# Altium PCB MEASURE_CURRENT_PCB_V1I1.PcbDoc
Units mil, origin at the board's own origin, x right, y up, seen from the top; angles counter-clockwise.
Board outline 2170 x 1965 mil, 2 copper layers (Top Layer, Bottom Layer); 14 components, 11 nets, 60 pads, 13 vias.
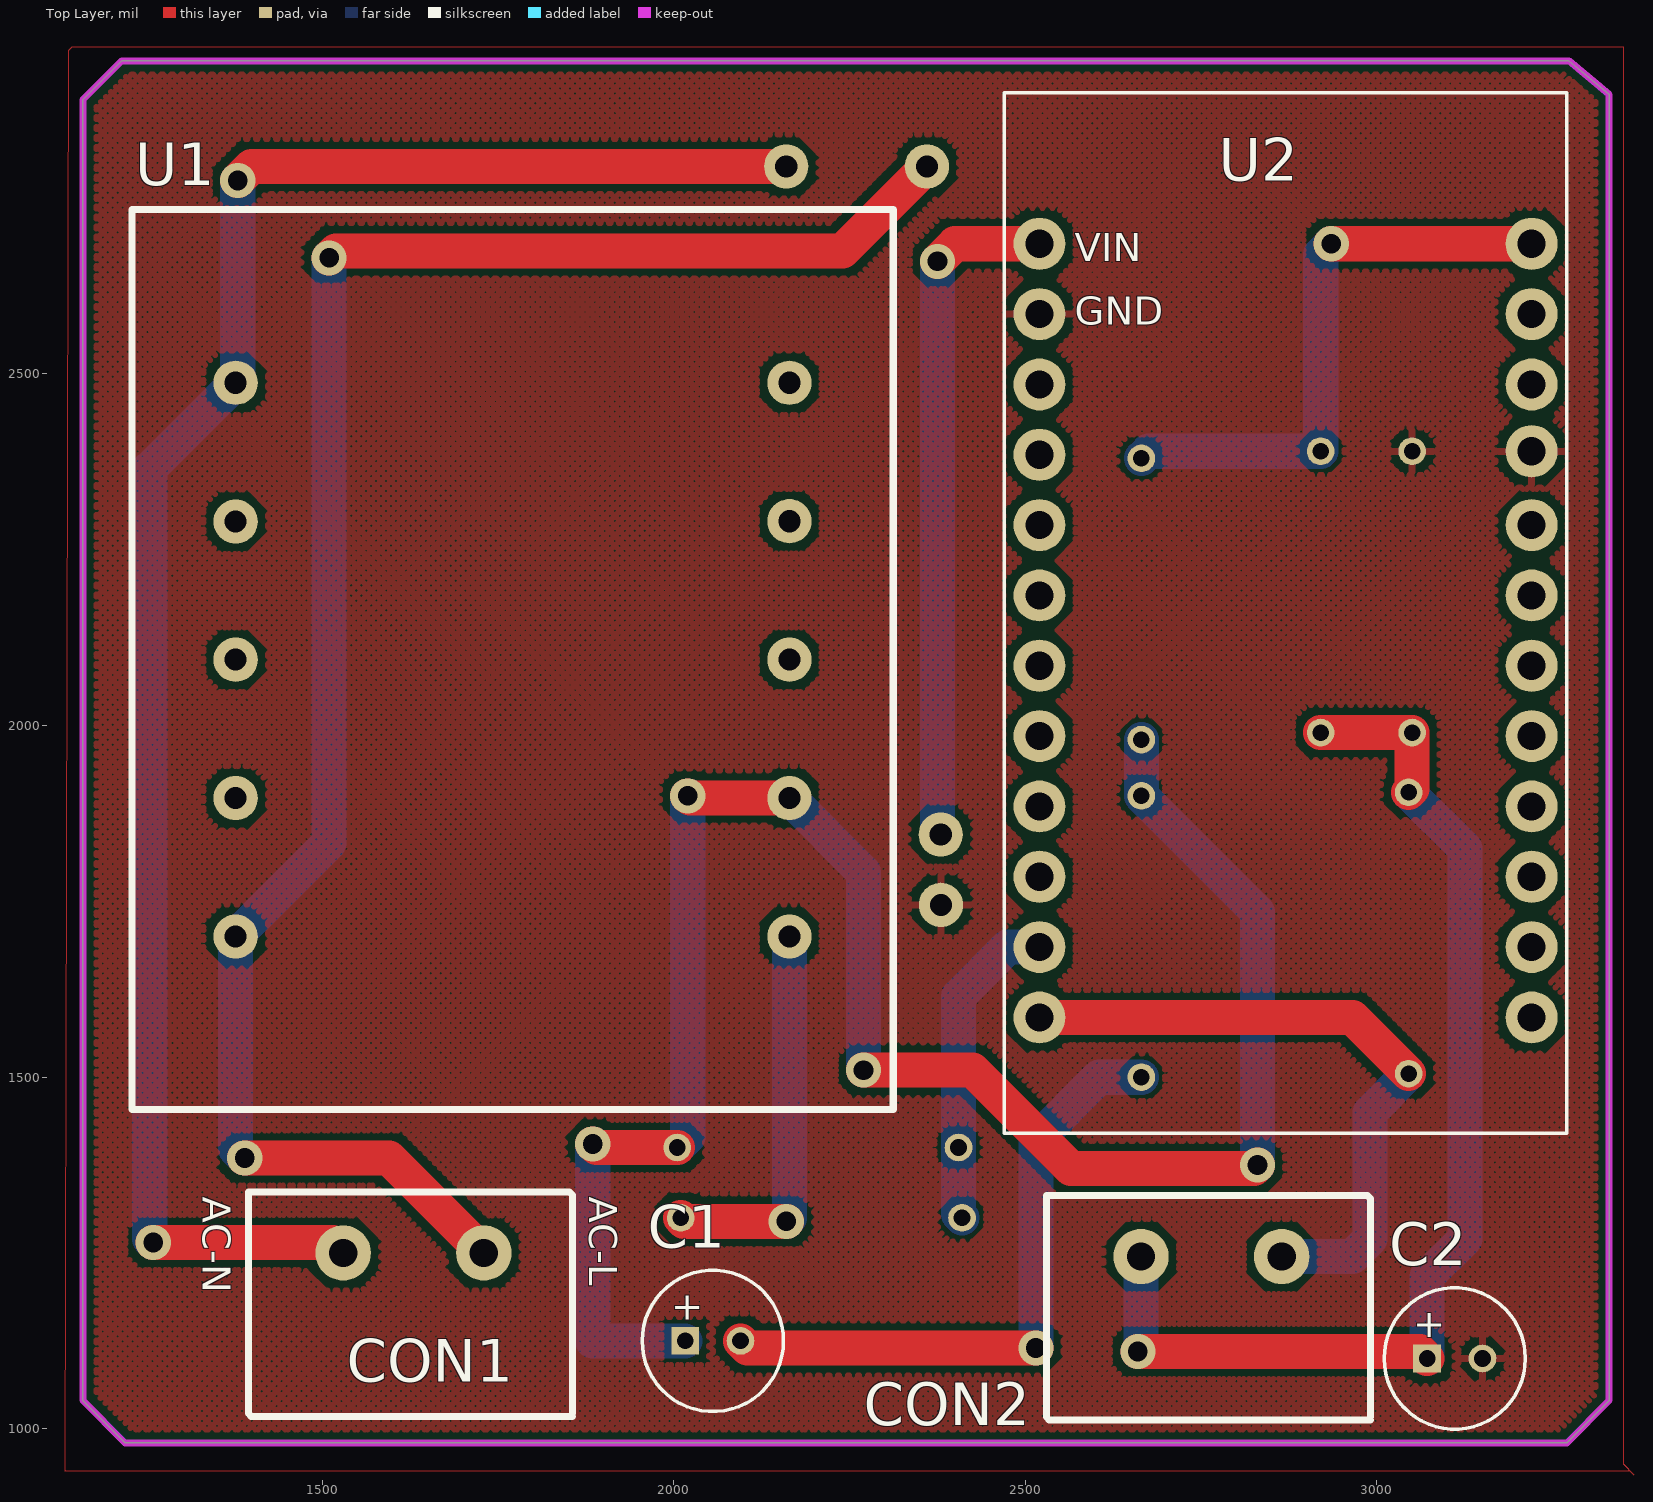
[diagram p0: Top Layer view]
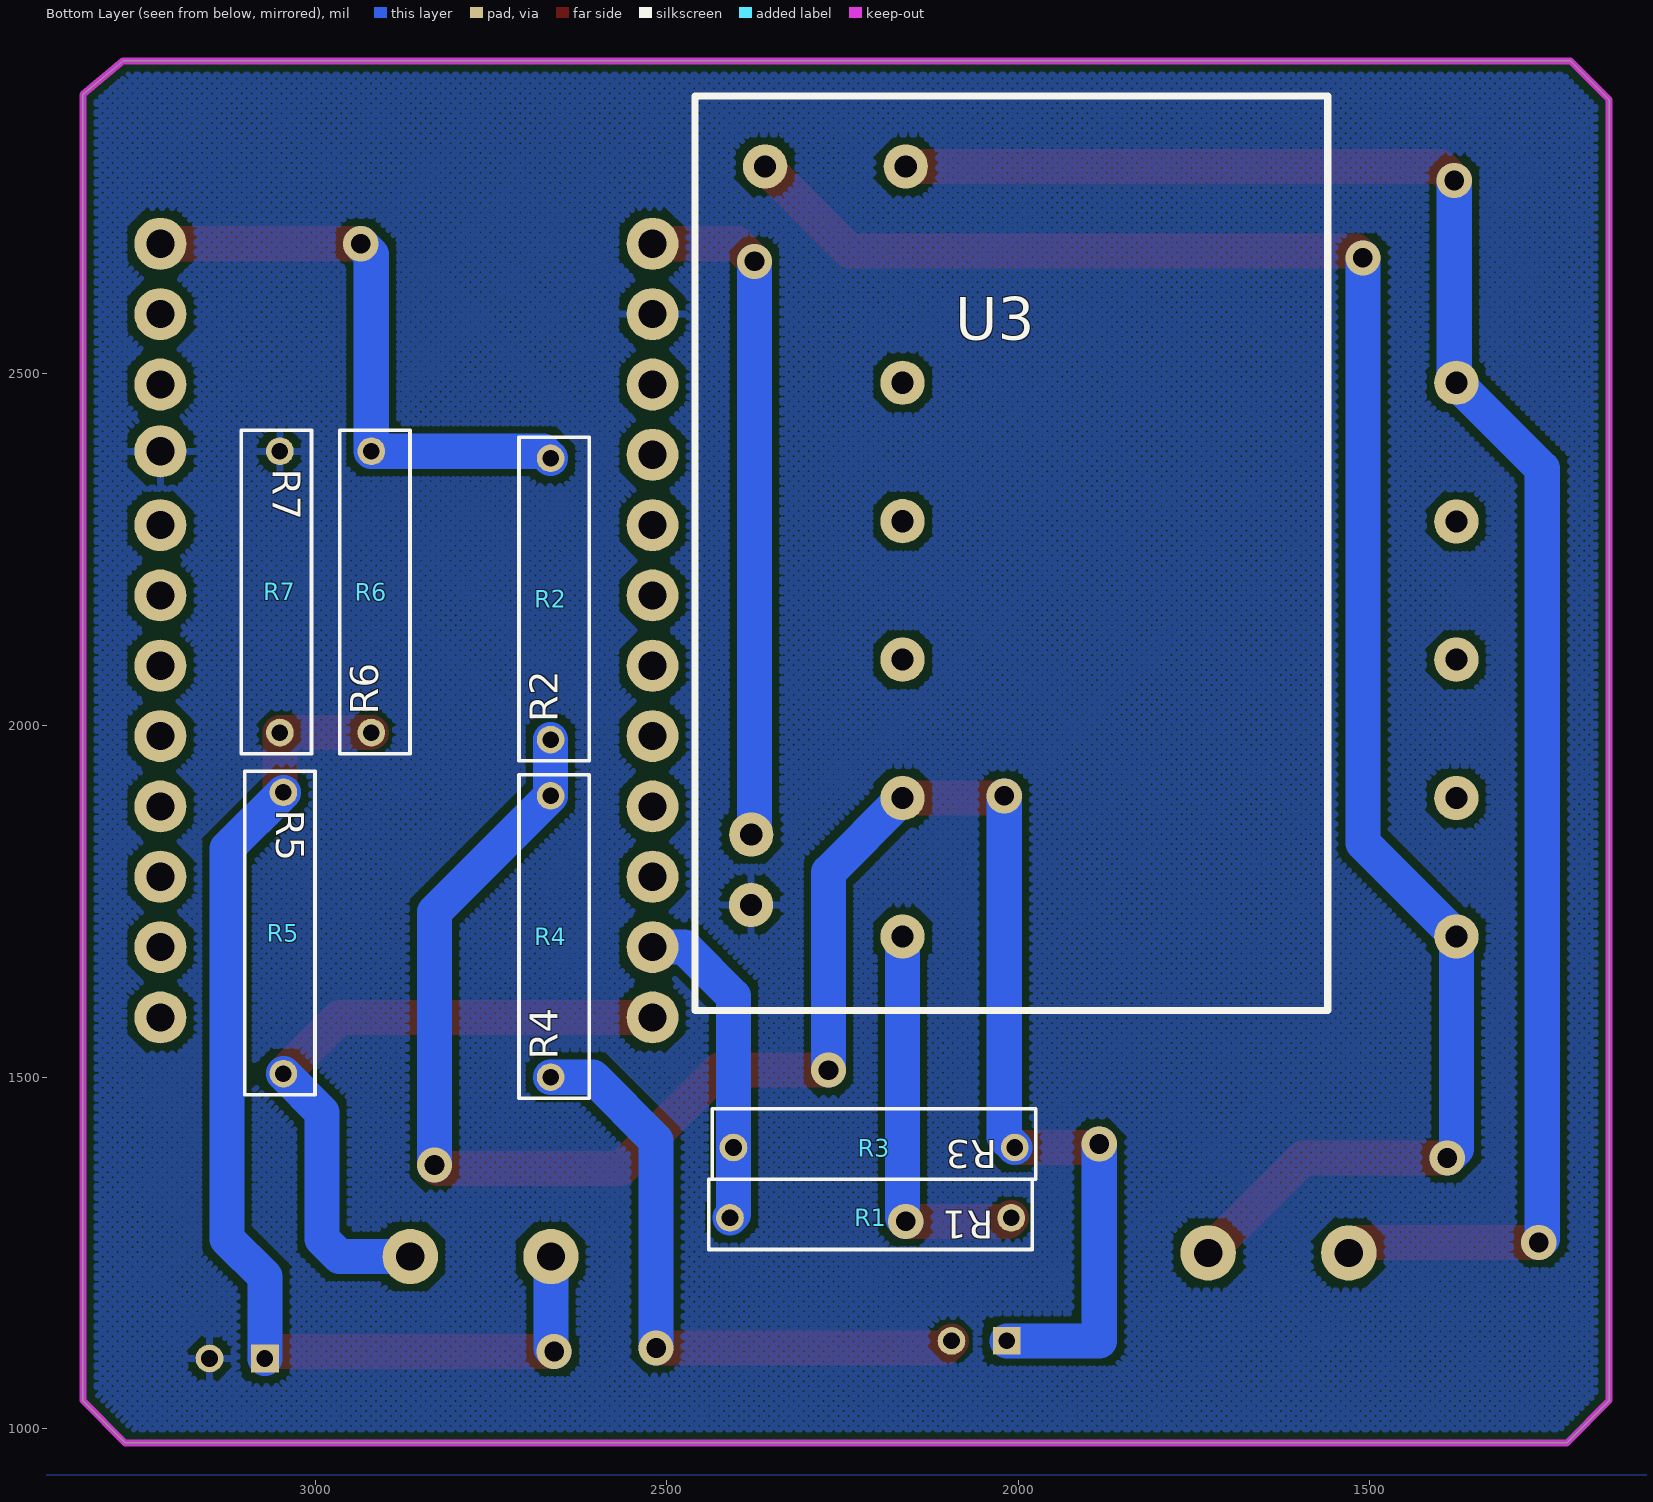
[diagram p1: Bottom Layer view, seen from below]

## Layer stack, top to bottom
Top Solder: solder mask 0.4, Solder Resist, Dk 3.5
Top Layer: signal copper 1.4
Dielectric 1: dielectric 12.6, FR-4, Dk 4.8
Bottom Layer: signal copper 1.4
Bottom Solder: solder mask 0.4, Solder Resist, Dk 3.5

## Board outline
1160,1040 1160,2890 1215,2945 3273,2945 3330,2897.5 3330,1040 3270,980 1220,980

## Design rules (kind name [scope] priority, off if disabled: settings)
Clearance [All] p1: gap=10
PolygonConnect [All] p1: connectstyle=Relief reliefconductorwidth=10 reliefentries=4 polygonreliefangle="90 Angle" airgapwidth=10
RoutingVias [All] p1: holewidth=28 width=50 viastyle="Through Hole" minholewidth=28 minwidth=50 maxholewidth=28 maxwidth=50
SolderMaskExpansion [All] p1: expansion=4
Width [All] p1: maxlimit=100 minlimit=10 preferedwidth=10
30 further rules are at their usual default settings.

## Components (designator, comment, footprint, x,y, rotation, side; value= is the part's Value field where it differs from the comment)
C1 "C_10uF_HOLE_ALUM_25V" C_10uF_HOLE_5mm 2016.26,1125 r0 top
C2 "C_10uF_HOLE_ALUM_25V" C_10uF_HOLE_5mm 3071.26,1100 r0 top
CON1 "CON_HEADER_MALE_PIN2" CON_HEADER_MALE_VAC 1730,1250 r180 top
CON2 "CON_HEADER_MALE_PIN2" CON_HEADER_MALE_PIN2 2864.52,1245 r180 top
R1 "R_100k_HOLE_0.1%_1W" R_HOLE_0.25W_0.4 2190,1305 r0 bottom
R2 "R_100k_HOLE_0.1%_1W" R_HOLE_0.25W_0.4 2660,2160 r90 bottom
R3 "R_10K_HOLE_1%_1W" R_HOLE_0.25W_0.4 2185,1405 r0 bottom
R4 "R_100k_HOLE_0.1%_1W" R_HOLE_0.25W_0.4 2660,1680 r90 bottom
R5 "R_18_HOLE_1%_1W" R_HOLE_0.25W_0.4 3050,1725 r270 bottom
R6 "R_22K_HOLE_1%_1/4W" R_HOLE_0.25W_0.4 2915,2170 r90 bottom
R7 "R_22K_HOLE_1%_1/4W" R_HOLE_0.25W_0.4 3055,2210 r270 bottom
U1 "POWER_BIENAP" POWER_BIEN_AP 1377.13,1700 r0 top
U2 "MODULE PHOTON RF" "MODULE PHOTON RF" 2470,2930 r0 top
U3 "POWER_CONVERT_220VACto5VDC" POWER_CONVERT220VACTO5VDC 2360,2795 r270 bottom

## Footprints (in the part's own frame and the unit in brackets; to place one, negate y for a bottom-side part, rotate by r counter-clockwise, add the part's x,y. Pads: shape width x height; smd on the part's side, far side on the other; paste and mask are expansions set on the pad)
C_10uF_HOLE_5mm [mm]
  rect 1x1 hole 0.6: 1(0,0)
  round 1 hole 0.6: 2(2,0)
  silkscreen extent -1.55,-2.55 3.55,2.55, body extent -1.5,-2.5 3.5,2.5, height 11
CON_HEADER_MALE_PIN2 [mm]
  round 2 hole 1.02: 1(0,0) 2(5.08,0)
  silkscreen extent -3.2,-2.2 8.5,5.9, body extent -3.2,-2.3 8.4,19.2, height 15.5
CON_HEADER_MALE_VAC [mm]
  round 2 hole 1.02: 1(0,0) 2(5.08,0)
  silkscreen extent -3.2,-2.2 8.5,5.9, body extent -3.2,-2.3 8.4,19.2, height 15.5
"MODULE PHOTON RF" [mil]
  round 74 hole 40: 1(50,-245) 2(50,-345) 3(50,-445) 4(50,-545) 5(50,-645) 6(50,-745) 7(50,-845) 8(50,-945) 9(50,-1045) 10(50,-1145) 11(50,-1245) 12(50,-1345) 13(750,-1345) 14(750,-1245) 15(750,-1145) 16(750,-1045) 17(750,-945) 18(750,-845) 19(750,-745) 20(750,-645) 21(750,-540) 22(750,-445) 23(750,-345) 24(750,-245)
  silkscreen extent 0,-1510 800,-30, body extent -1,-1512 801,-30, height 294
POWER_BIEN_AP [mm]
  round 1.6 hole 0.8: 1(0,20) 2(0,14.986) 3(0,10) 4(0,5) 5(0,0) 6(20,0) 7(20,5) 8(20,10) 9(20,15) 10(20,20)
  silkscreen extent -3.75,-6.25 23.75,26.25, body extent -2.54,-5.08 22.86,25.4, height 24
POWER_CONVERT220VACTO5VDC [mm]
  round 1.6 hole 0.8: 1(0,0) 2(0,5.08) 3(26.67,-0.508) 4(24.13,-0.5)
  silkscreen extent -2.54,-2.54 30.48,20.32, body extent -1.27,-1.27 29.21,19.05, height 15
R_HOLE_0.25W_0.4 [mm]
  round 1 hole 0.6: 1(-4.572,0.127) 2(5.588,0.127)
  silkscreen extent -5.33,-1.27 6.35,1.27, body extent -4.83,-1.04 5.94,1.27, height 2.93

## Part data
C1 C2: "CAP ALUM 10uF 20% 25V"
CON1 CON2: "TERM BLOCK HDR 2POS R/A 5.08MM"
R1 R2 R4: "RESISTOR METAL FILM 1W 100K OHM"
R3: "RES 10.0K OHM 1W 1% AXIAL"
R5: "RES 18 OHM 1W 1% AXIAL"
R6 R7: "RES 22K OHM 1/4W 1% AXIAL"
U2: "PARTICLE PHOTON"

## Via types
v1: diameter 50, hole 28, Top Layer to Bottom Layer, 13 vias

## Nets (pads, with @x,y where several pads share a name; then routed paths per layer and width w, separated by ;. In a path a pad name is that pad's centre, name@x,y a point inside that pad or via, vN(x,y) a via of type N, cw(c..) or ccw(c..) an arc to the next point about the centre after c; other vN are vias at no path point)
5VCC: U2.1 U3.4 | length 972.3
  Top Layer w50: v1(2375,2660) 2400,2685 U2.1
  Bottom Layer w50: v1(2375,2660) 2375,1849.68 U3.4
A1: R1.2 R3.2 U2.11 | length 461.1
  Bottom Layer w50: R1.2 2405,1305 R3.2 2405,1615 2475,1685 U2.11
A2: CON2.1 R5.2 U2.12 | length 951.8
  Top Layer w50: U2.12 2965,1585 R5.2
  Bottom Layer w50: CON2.1 2965,1245 2990,1270 2990,1450 R5.2
GND: C2.2 R7.1 U2.2 U2.21 U3.3
NetC1_1: C1.1 R2.1 R3.1 R4.2 U1.7 | length 2909.3
  Top Layer w50: v1(1885,1405) 1890,1400 R3.1 ; v1(2020,1900) 2023.15,1896.85 U1.7 ; v1(2270,1510) 2425,1510 2565,1370 2825,1370 v1(2830,1375)
  Bottom Layer w50: v1(1885,1405) 1885,1125 C1.1 ; R3.1 2020,1415 v1(2020,1900) ; U1.7 2270,1791.38 v1(2270,1510) ; R2.1 R4.2 2830,1735 v1(2830,1375)
NetC1_2: C1.2 R4.1 | length 906.4
  Top Layer w50: C1.2 2105,1115 v1(2515,1115)
  Bottom Layer w50: v1(2515,1115) 2515,1410 2605,1500 R4.1
NetC2_1: C2.1 CON2.2 R5.1 R6.1 R7.2 | length 1629.7
  Top Layer w50: v1(2660,1110) 3061.26,1110 C2.1 ; R6.1 R7.2 3050,1910 R5.1
  Bottom Layer w50: v1(2660,1110) 2664.52,1114.52 CON2.2 ; R5.1 3125,1825 3125,1270 3071.26,1216.26 C2.1
NetCON1_1: CON1.1 U1.5 U3.1 | length 2640.1
  Top Layer w50: v1(1390,1385) 1595,1385 CON1.1 ; v1(1510,2665) 1520,2675 2240,2675 U3.1
  Bottom Layer w50: v1(1390,1385) 1377.13,1397.87 U1.5 1510,1832.87 v1(1510,2665)
NetCON1_2: CON1.2 U1.1 U3.2 | length 2628.3
  Top Layer w50: v1(1260,1265) 1515,1265 CON1.2 ; v1(1380,2775) 1400,2795 U3.2
  Bottom Layer w50: v1(1260,1265) 1255,1270 1255,2365.28 U1.1 1380,2490.28 v1(1380,2775)
NetR1_1: R1.1 U1.6 | length 558.9
  Top Layer w50: R1.1 2015,1295 v1(2160,1295)
  Bottom Layer w50: v1(2160,1295) 2164.53,1299.53 U1.6
VCC: R2.2 R6.2 U2.24 | length 845.4
  Top Layer w50: v1(2935,2685) U2.24
  Bottom Layer w50: R2.2 2675,2390 R6.2 2920,2670 v1(2935,2685)
pads on no net: U1.2 U1.3 U1.4 U1.8 U1.9 U1.10 U2.3 U2.4 U2.5 U2.6 U2.7 U2.8 U2.9 U2.10 U2.13 U2.14 U2.15 U2.16 U2.17 U2.18 U2.19 U2.20 U2.22 U2.23

## Polygon pours and split planes (outlines as drawn)
GND on Top Layer "GND_L01_P008" (hatched 45Degree grid 10 track 8, remove dead copper, pour order 8): 980,3040 3430,3040 3450,3020 3465,3005 3465,925 1110,925 995,1040
GND on Top Layer "NONET_L01_P006" (hatched 45Degree grid 10 track 8, remove dead copper, shelved, pour order 6): 1140,2960 1145,2965 3350,2965 3350,950 3365,935 3360,940 1135,940
GND on Top Layer "NONET_L01_P000" (hatched 45Degree grid 10 track 8, remove dead copper, shelved, pour order 0): 1035,3130 1145,3020 3525,3020 3525,760 3575,710 3530,755 860,755
GND on Bottom Layer "GND_L02_P010" (hatched 45Degree grid 10 track 8, remove dead copper, pour order 10): 1095,3005 1115,2985 3400,2985 3400,940 3375,915 3360,900 1050,900
GND on Bottom Layer "NONET_L02_P004" (hatched 45Degree grid 10 track 8, remove dead copper, shelved, pour order 4): 1050,3040 3395,3040 3395,940 3400,935 3395,935 1055,935 1050,940

## Keep-outs
Keep-Out Layer:
  the board outline again, w10

## Text inside footprints (layer, text, board x,y; h text height)
C1: Top Overlay "+" at 1996.26,1155 h40
C2: Top Overlay "+" at 3051.26,1130 h40
CON1: Top Overlay "AC-L" at 1880,1330 h40 r270; Top Overlay "AC-N" at 1330,1330 h40 r270
U2: Top Overlay "VIN" at 2570,2660 h40; Top Overlay "GND" at 2570,2570 h40